# EAGLE board prislusenstvi-Kurnik (EAGLE 7.6.0)
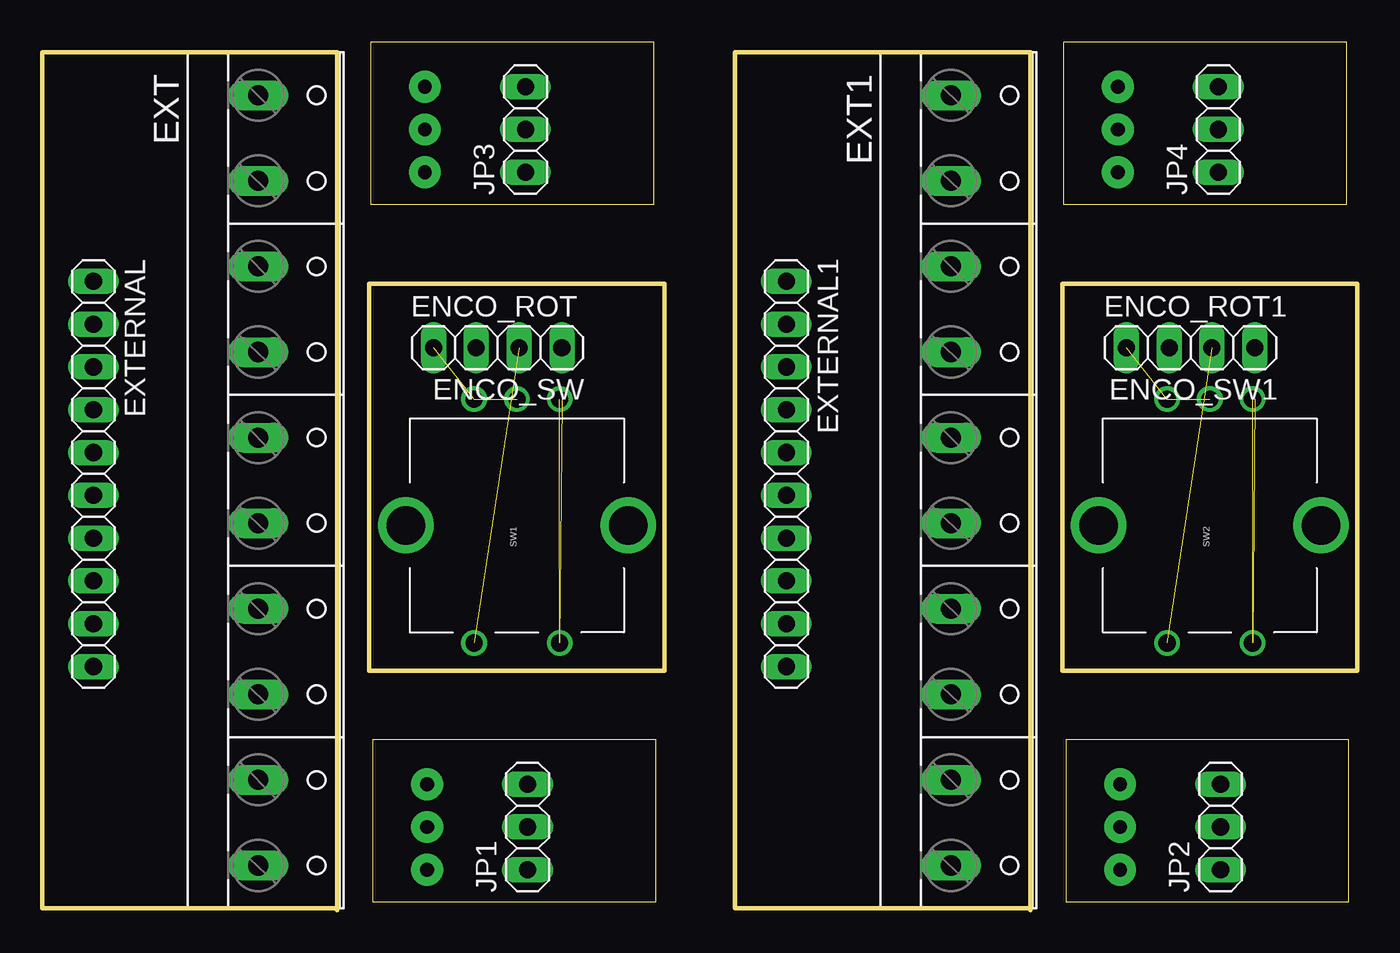
[diagram p0: board, top side]
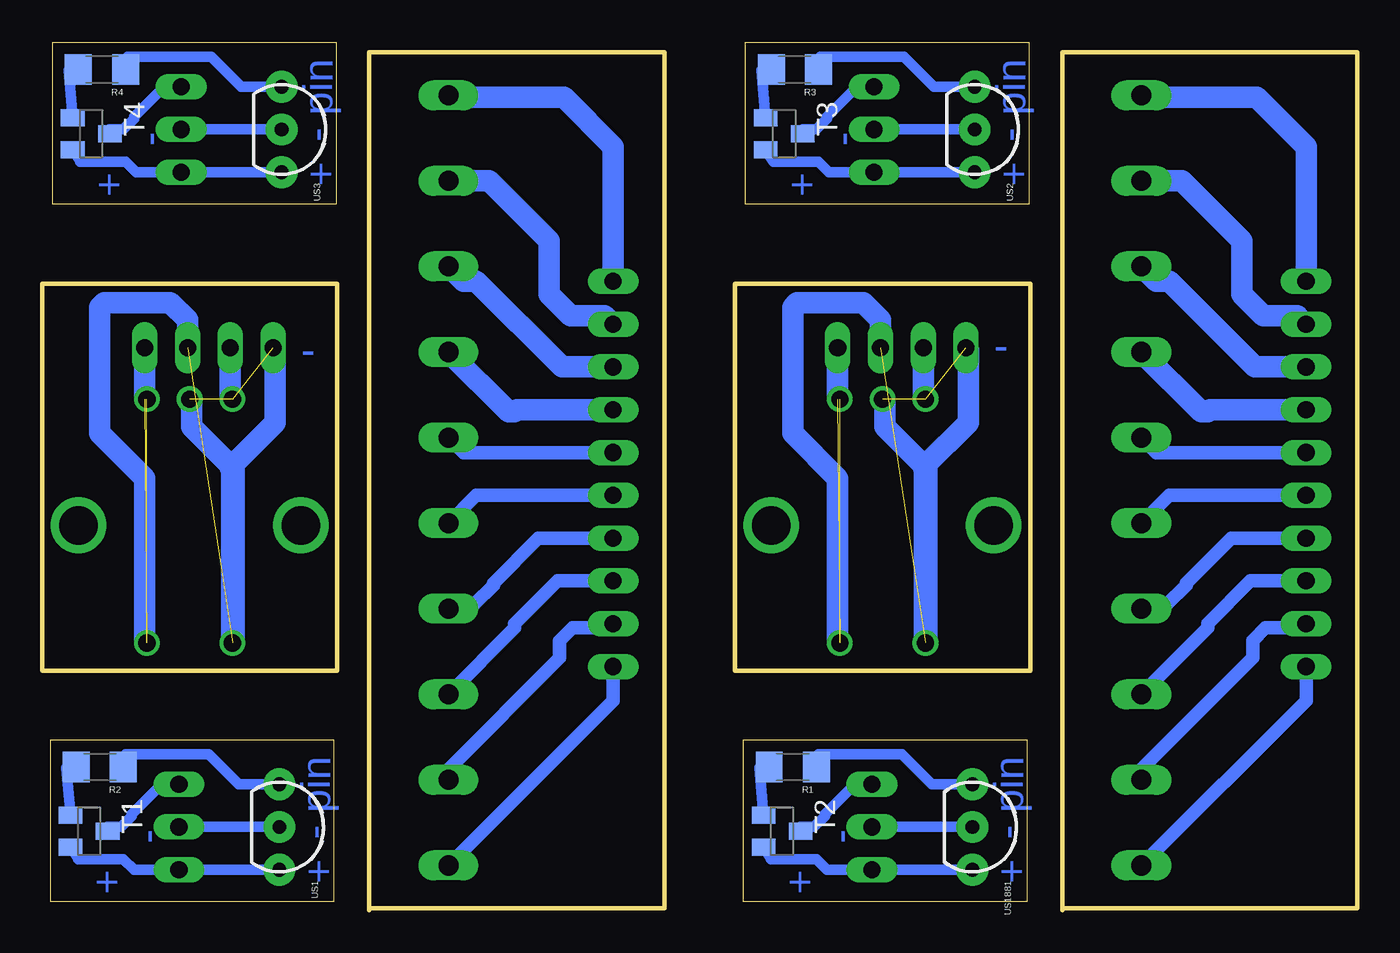
[diagram p1: board, bottom side, seen from below]

Size 78.11 x 51.54 mm. Coordinates in mm from the lower left corner, seen from the top.
Outline: 17.4,0.13 0,0.13 0,50.93 17.53,50.93 17.53,0
Outline: 58.55,0.13 41.15,0.13 41.15,50.93 58.67,50.93 58.67,0
Outline: 19.43,14.22 19.43,37.21 36.96,37.21 36.96,14.22 19.43,14.22
Outline: 36.45,0.51 36.45,10.14 19.63,10.14 19.63,0.51 36.45,0.51
Outline: 36.32,41.91 36.32,51.54 19.51,51.54 19.51,41.91 36.32,41.91
Outline: 60.58,14.22 60.58,37.21 78.11,37.21 78.11,14.22 60.58,14.22
Outline: 77.6,0.51 77.6,10.14 60.78,10.14 60.78,0.51 77.6,0.51
Outline: 77.47,41.91 77.47,51.54 60.66,51.54 60.66,41.91 77.47,41.91
Copper layers (1*16): Top 0.035mm / dielectric 1.5mm / Bottom 0.035mm
Design rules "default": minimum track width 10mil, minimum drill 24mil, track to track 8mil, track to pad 8mil, pad to pad 8mil, via to via 8mil, smd to smd 8mil, copper to edge 40mil, drill to drill 8mil, minimum pad ring 10mil, minimum via ring 8mil, stop-mask expansion 4mil, vias tented up to drill 0mil, thermal gap 10mil
Net classes: 0 default: width 0.508 mm, clearance 0.6 mm

## Footprints (pad centres in the part's own frame; a part is rotated, then mirrored left to right if it is on the bottom)
1X03 = drill 1.016 long: 1 -2.54,0; 2 0,0; 3 2.54,0
1X02 = drill 1.016 long: 1 -1.27,0; 2 1.27,0
W237-10P = drill 1.194 long: 1 -22.86,-0.635; 2 -17.78,-0.635; 3 -12.7,-0.635; 4 -7.62,-0.635; 5 -2.54,-0.635; 6 2.54,-0.635; 7 7.62,-0.635; 8 12.7,-0.635; 9 17.78,-0.635; 10 22.86,-0.635
1X10 = drill 1.016 long: 1 -11.43,0; 2 -8.89,0; 3 -6.35,0; 4 -3.81,0; 5 -1.27,0; 6 1.27,0; 7 3.81,0; 8 6.35,0; 9 8.89,0; 10 11.43,0
1206 = smd 1.6 x 1.8: 1 -1.4,0; 2 1.4,0
ROTARY_ENC_PLAIN = drill 1.016: A 7.493,-2.54; B 7.493,2.54; C 7.493,0; SW+ -6.985,2.54; SW- -6.985,-2.54 | drill 2.286: P$3 0,6.604; P$4 0,-6.604
SOT23-BEC = smd 1 x 1.4: B -0.95,-1.1; C 0,1.1; E 0.95,-1.1
TO-92-AMMO = drill 0.813 pad 1.88: 1 -2.54,0; 2 0,0; 3 2.54,0

## Placement (x,y rotation side)
ENCO_ROT  [1X03]  25.78,33.4 0 top
ENCO_ROT1  [1X03]  66.93,33.4 0 top
ENCO_SW  [1X02]  29.59,33.4 180 top
ENCO_SW1  [1X02]  70.74,33.4 180 top
EXT  [W237-10P]  13.46,25.53 270 top
EXT1  [W237-10P]  54.61,25.53 270 top
EXTERNAL  [1X10]  3.05,25.91 270 top
EXTERNAL1  [1X10]  44.2,25.91 270 top
JP1  [1X03]  28.83,4.95 90 top
JP2  [1X03]  69.98,4.95 90 top
JP3  [1X03]  28.7,46.35 90 top
JP4  [1X03]  69.85,46.35 90 top
R1  10k  [1206]  33.53,8.51 180 bottom
R2  10k  [1206]  74.68,8.51 180 bottom
R3  10k  [1206]  33.4,49.91 180 bottom
R4  10k  [1206]  74.55,49.91 180 bottom
SW1  ROTARTY_ENCODER  [ROTARY_ENC_PLAIN]  28.19,22.86 90 top
SW2  ROTARTY_ENCODER  [ROTARY_ENC_PLAIN]  69.34,22.86 90 top
T1  BC807-25  [SOT23-BEC]  75.31,4.7 270 bottom
T2  BC807-25  [SOT23-BEC]  34.16,4.7 270 bottom
T3  BC807-25  [SOT23-BEC]  34.04,46.1 270 bottom
T4  BC807-25  [SOT23-BEC]  75.18,46.1 270 bottom
US1  [TO-92-AMMO]  64.01,4.95 270 bottom
US2  [TO-92-AMMO]  22.73,46.35 270 bottom
US3  [TO-92-AMMO]  63.88,46.35 270 bottom
US1881  [TO-92-AMMO]  22.86,4.95 270 bottom

## Library data of the parts
ENCO_ROT ENCO_ROT1 ENCO_SW ENCO_SW1 EXTERNAL EXTERNAL1 JP1-JP4 = pinhead
EXT EXT1 = con-wago-508
R1-R4 = SparkFun-Resistors
SW1 SW2 = SparkFun-Electromechanical
T1-T4 = transistor
US1-US3 US1881 = SparkFun-DiscreteSemi

## Nets
5V: JP1.1 T2.E US1881.3
5V1: JP2.1 T1.E US1.3
5V2: JP3.1 T3.E US2.3
5V3: JP4.1 T4.E US3.3
E_BAT+: EXT.1 EXTERNAL.1
E_BAT+1: EXT1.1 EXTERNAL1.1
E_BAT-: EXT.2 EXTERNAL.2
E_BAT-1: EXT1.2 EXTERNAL1.2
E_DOOR1: EXT.7 EXTERNAL.7
E_DOOR2: EXT.8 EXTERNAL.8
E_DOOR3: EXT1.8 EXTERNAL1.8
E_DOOR4: EXT1.7 EXTERNAL1.7
E_GND: EXT.6 EXTERNAL.6
E_GND1: EXT1.6 EXTERNAL1.6
E_GND_T: EXT.10 EXTERNAL.10
E_GND_T1: EXT1.10 EXTERNAL1.10
E_LED+: EXT.5 EXTERNAL.5
E_LED+1: EXT1.5 EXTERNAL1.5
E_MOT+: EXT.3 EXTERNAL.3
E_MOT+1: EXT1.3 EXTERNAL1.3
E_MOT-: EXT.4 EXTERNAL.4
E_MOT-1: EXT1.4 EXTERNAL1.4
E_TEMP: EXT.9 EXTERNAL.9
E_TEMP1: EXT1.9 EXTERNAL1.9
GND: JP1.2 US1881.2
GND1: JP2.2 US1.2
GND2: JP3.2 US2.2
GND3: JP4.2 US3.2
N$1: R1.2 T2.B
N$2: R1.1 US1881.1
N$3: ENCO_SW1.2 SW2.SW+
N$4: ENCO_SW1.1 SW2.SW-
N$5: R3.2 T3.B
N$6: R3.1 US2.1
N$7: ENCO_ROT1.2 SW2.C
N$8: ENCO_ROT1.1 SW2.B
N$9: ENCO_ROT1.3 SW2.A
N$10: R2.2 T1.B
N$11: R2.1 US1.1
N$12: R4.2 T4.B
N$13: R4.1 US3.1
N$23: ENCO_SW.2 SW1.SW+
N$24: ENCO_SW.1 SW1.SW-
N$25: ENCO_ROT.2 SW1.C
N$26: ENCO_ROT.1 SW1.B
N$27: ENCO_ROT.3 SW1.A
PIN: JP1.3 T2.C
PIN1: JP2.3 T1.C
PIN2: JP3.3 T3.C
PIN3: JP4.3 T4.C

## Tracks (layer width: path | path; a pad name or v marks a point on that pad's centre or on a via)
5V
  Bottom 0.61: US1881.3 JP1.1 31.5,2.41 32.13,3.05 34.82,3.05 T2.E
5V1
  Bottom 0.61: US1.3 JP2.1 72.64,2.41 73.28,3.05 75.96,3.05 T1.E
5V2
  Bottom 0.61: US2.3 JP3.1 31.37,43.81 32,44.45 34.69,44.45 T3.E
5V3
  Bottom 0.61: US3.3 JP4.1 72.52,43.81 73.15,44.45 75.84,44.45 T4.E
E_BAT+
  Bottom 1.27: EXTERNAL.1 3.05,45.34 5.97,48.26 12.95,48.26 | 13.34,48.26 12.95,48.26 | 12.95,48.26 EXT.1
E_BAT+1
  Bottom 1.27: EXTERNAL1.1 44.2,45.34 47.12,48.26 54.1,48.26 | 54.48,48.26 54.1,48.26 | 54.1,48.26 EXT1.1
E_BAT-
  Bottom 1.27: EXT.2 10.41,43.31 6.86,39.75 6.86,36.58 5.59,35.31 3.56,35.31 EXTERNAL.2
E_BAT-1
  Bottom 1.27: EXT1.2 51.56,43.31 48.01,39.75 48.01,36.58 46.74,35.31 44.7,35.31 EXTERNAL1.2
E_DOOR1
  Bottom 0.813: EXTERNAL.7 7.49,22.1 10.16,19.43 10.16,19.3 11.3,18.16 12.57,18.16 EXT.7
E_DOOR2
  Bottom 0.813: EXTERNAL.8 6.35,19.56 8.89,17.02 8.89,16.76 EXT.8
E_DOOR3
  Bottom 0.813: EXTERNAL1.8 47.5,19.56 50.04,17.02 50.04,16.76 EXT1.8
E_DOOR4
  Bottom 0.813: EXTERNAL1.7 48.64,22.1 51.31,19.43 51.31,19.3 52.45,18.16 53.72,18.16 EXT1.7
E_GND
  Bottom 0.813: EXTERNAL.6 11.18,24.64 EXT.6
E_GND1
  Bottom 0.813: EXTERNAL1.6 52.32,24.64 EXT1.6
E_GND_T
  Bottom 0.813: EXTERNAL.10 3.05,12.45 EXT.10
E_GND_T1
  Bottom 0.813: EXTERNAL1.10 44.2,12.45 EXT1.10
E_LED+
  Bottom 0.813: EXTERNAL.5 11.94,27.18 EXT.5
E_LED+1
  Bottom 0.813: EXTERNAL1.5 53.09,27.18 EXT1.5
E_MOT+
  Bottom 1.27: EXTERNAL.3 6.1,32.26 11.18,37.34 11.94,37.34 EXT.3
E_MOT+1
  Bottom 1.27: EXTERNAL1.3 47.24,32.26 52.32,37.34 53.09,37.34 EXT1.3
E_MOT-
  Bottom 1.27: EXTERNAL.4 8.76,29.72 8.89,29.59 9.27,29.59 EXT.4
E_MOT-1
  Bottom 1.27: EXTERNAL1.4 49.91,29.72 50.04,29.59 50.42,29.59 EXT1.4
E_TEMP
  Bottom 0.813: EXT.9 12.83,8.38 6.22,14.99 6.22,16 5.46,16.76 3.3,16.76 EXTERNAL.9
E_TEMP1
  Bottom 0.813: EXT1.9 53.98,8.38 47.37,14.99 47.37,16 46.61,16.76 44.45,16.76 EXTERNAL1.9
GND
  Bottom 0.61: US1881.2 JP1.2
GND1
  Bottom 0.61: US1.2 JP2.2
GND2
  Bottom 0.61: US2.2 JP3.2
GND3
  Bottom 0.61: US3.2 JP4.2
N$1
  Bottom 0.61: T2.B 35.52,8.46 R1.2
N$2
  Bottom 0.61: US1881.1 25.27,7.49 27.05,9.27 32,9.27 R1.1
N$3  (1 unrouted)
N$4  (1 unrouted)
  Bottom 1.27: ENCO_SW1.1 72.01,30.35
N$5
  Bottom 0.61: T3.B 35.39,49.87 R3.2
N$6
  Bottom 0.61: US2.1 25.15,48.9 26.92,50.67 31.87,50.67 R3.1
N$7  (1 unrouted)
  Bottom 1.27: 64.26,33.27 64.26,28.96 66.8,26.42 66.93,26.29 66.93,26.42 69.22,28.7 69.22,30.23 SW2.C | ENCO_ROT1.2 66.93,30.48 66.8,30.35
  Bottom 1.422: 66.8,26.42 66.8,16
N$8  (1 unrouted)
N$9  (1 unrouted)
  Bottom 1.27: ENCO_ROT1.3 69.47,35.05 70.48,36.07 74.42,36.07 74.68,35.81 74.68,28.32 72.01,25.65 72.01,16 71.88,15.88
N$10
  Bottom 0.61: T1.B 76.67,8.46 R2.2
N$11
  Bottom 0.61: US1.1 66.42,7.49 68.2,9.27 73.15,9.27 R2.1
N$12
  Bottom 0.61: T4.B 76.54,49.87 R4.2
N$13
  Bottom 0.61: US3.1 66.29,48.9 68.07,50.67 73.02,50.67 R4.1
N$23  (1 unrouted)
N$24  (1 unrouted)
  Bottom 1.27: ENCO_SW.1 30.86,30.35
N$25  (1 unrouted)
  Bottom 1.27: 23.11,33.27 23.11,28.96 25.65,26.42 25.78,26.29 25.78,26.42 28.07,28.7 28.07,30.23 SW1.C | ENCO_ROT.2 25.78,30.48 25.65,30.35
  Bottom 1.422: 25.65,26.42 25.65,16
N$26  (1 unrouted)
N$27  (1 unrouted)
  Bottom 1.27: ENCO_ROT.3 28.32,35.05 29.34,36.07 33.27,36.07 33.53,35.81 33.53,28.32 30.86,25.65 30.86,16 30.73,15.88
PIN
  Bottom 0.61: JP1.3 29.84,7.49 31.62,5.71 31.62,5.59 32.26,4.95 33.06,4.95 T2.C
PIN1
  Bottom 0.61: JP2.3 70.99,7.49 72.77,5.71 72.77,5.59 73.41,4.95 74.21,4.95 T1.C
PIN2
  Bottom 0.61: JP3.3 29.72,48.9 31.5,47.12 31.5,46.99 32.13,46.35 32.94,46.35 T3.C
PIN3
  Bottom 0.61: JP4.3 70.87,48.9 72.64,47.12 72.64,46.99 73.28,46.35 74.08,46.35 T4.C

## Text on the board
Bottom: pin | pin | - | - | - | - | + | + | + | + | - | - | pin | pin | - | - | - | - | + | + | + | +